# Altium PCB PCB.PcbDoc
Units mil, origin at the board's own origin, x right, y up, seen from the top; angles counter-clockwise.
Board outline 2065 x 2740 mil, 2 copper layers (Top Layer, Bottom Layer); 53 components, 32 nets, 178 pads, 6 vias.
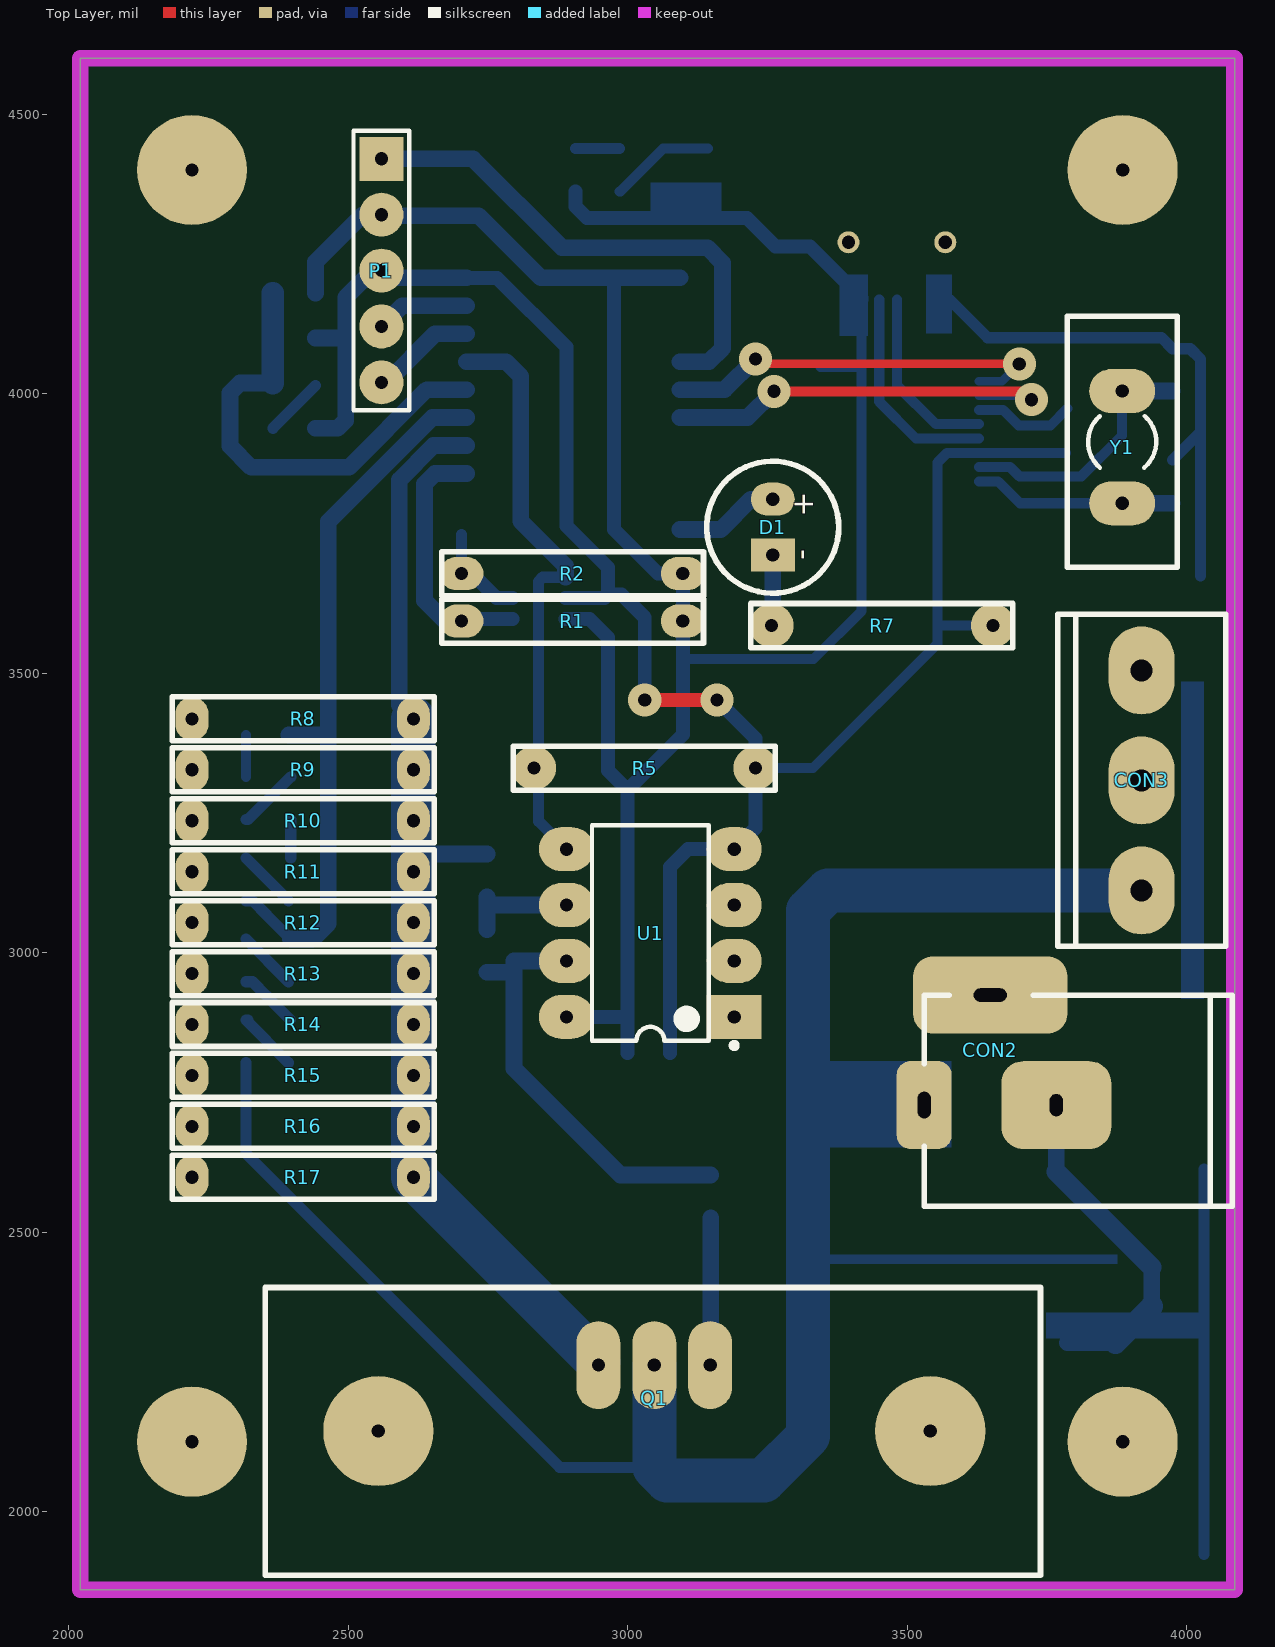
[diagram p0: Top Layer view]
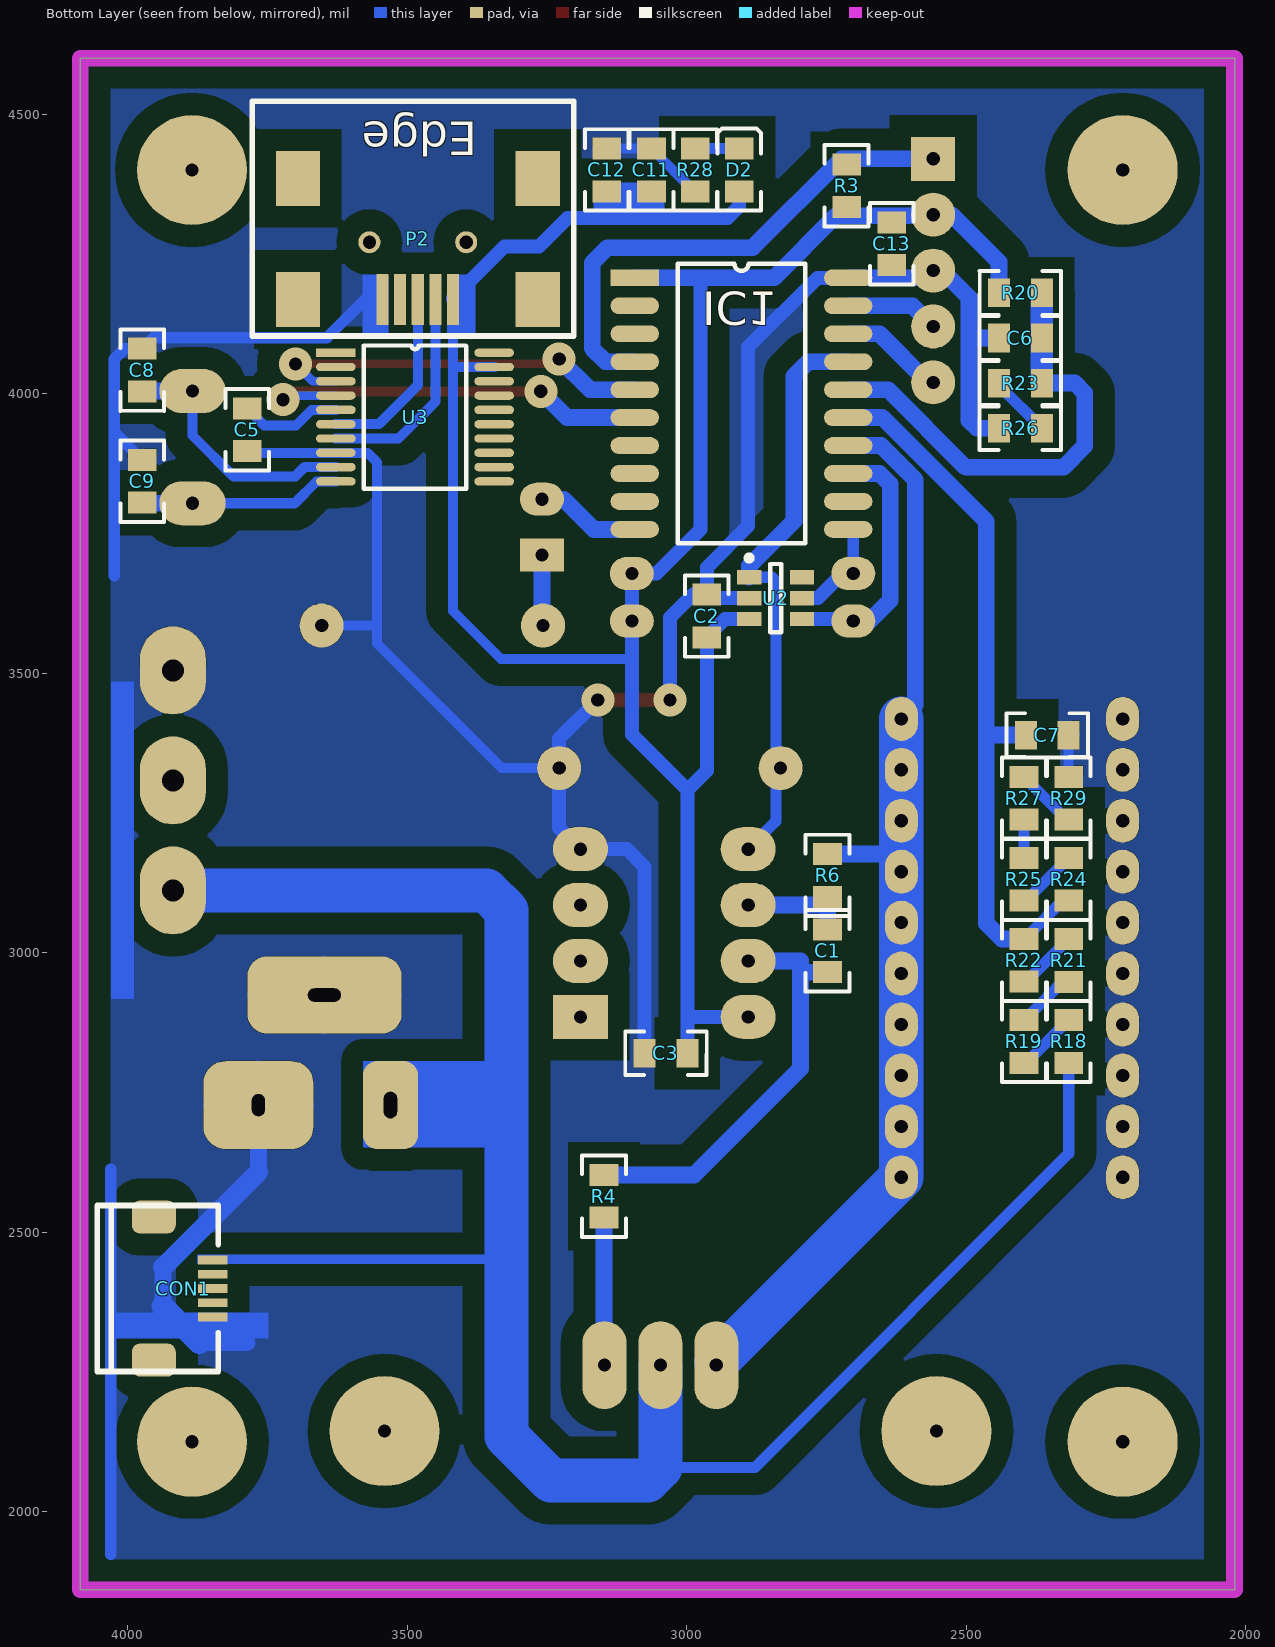
[diagram p1: Bottom Layer view, seen from below]
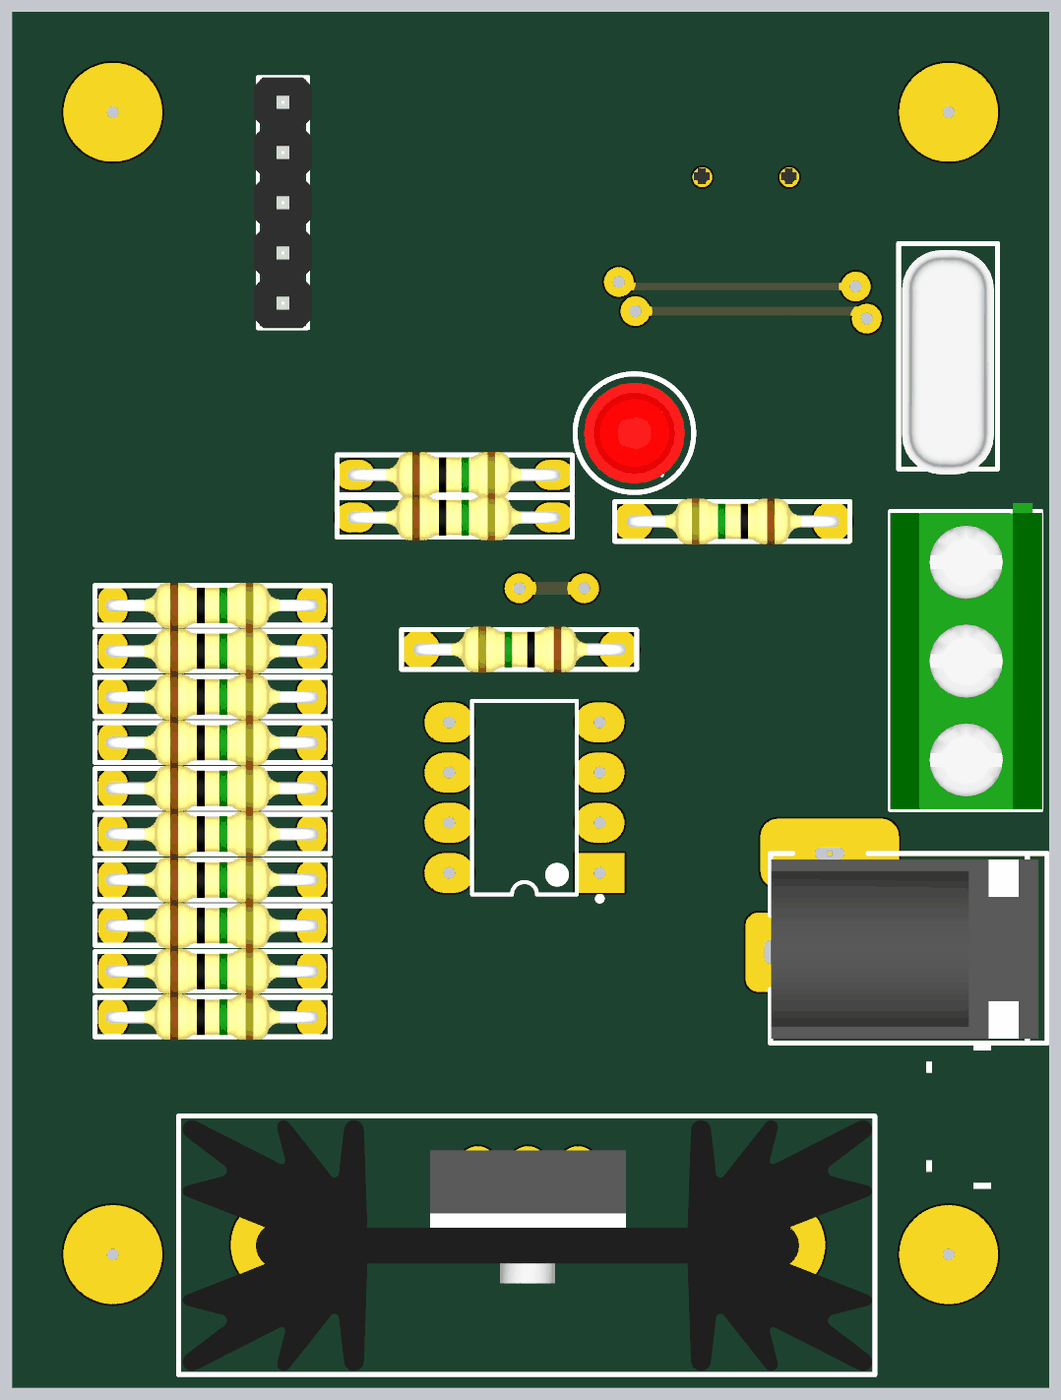
[diagram p2: 3D render of the assembled board from above, using the file's embedded part models]
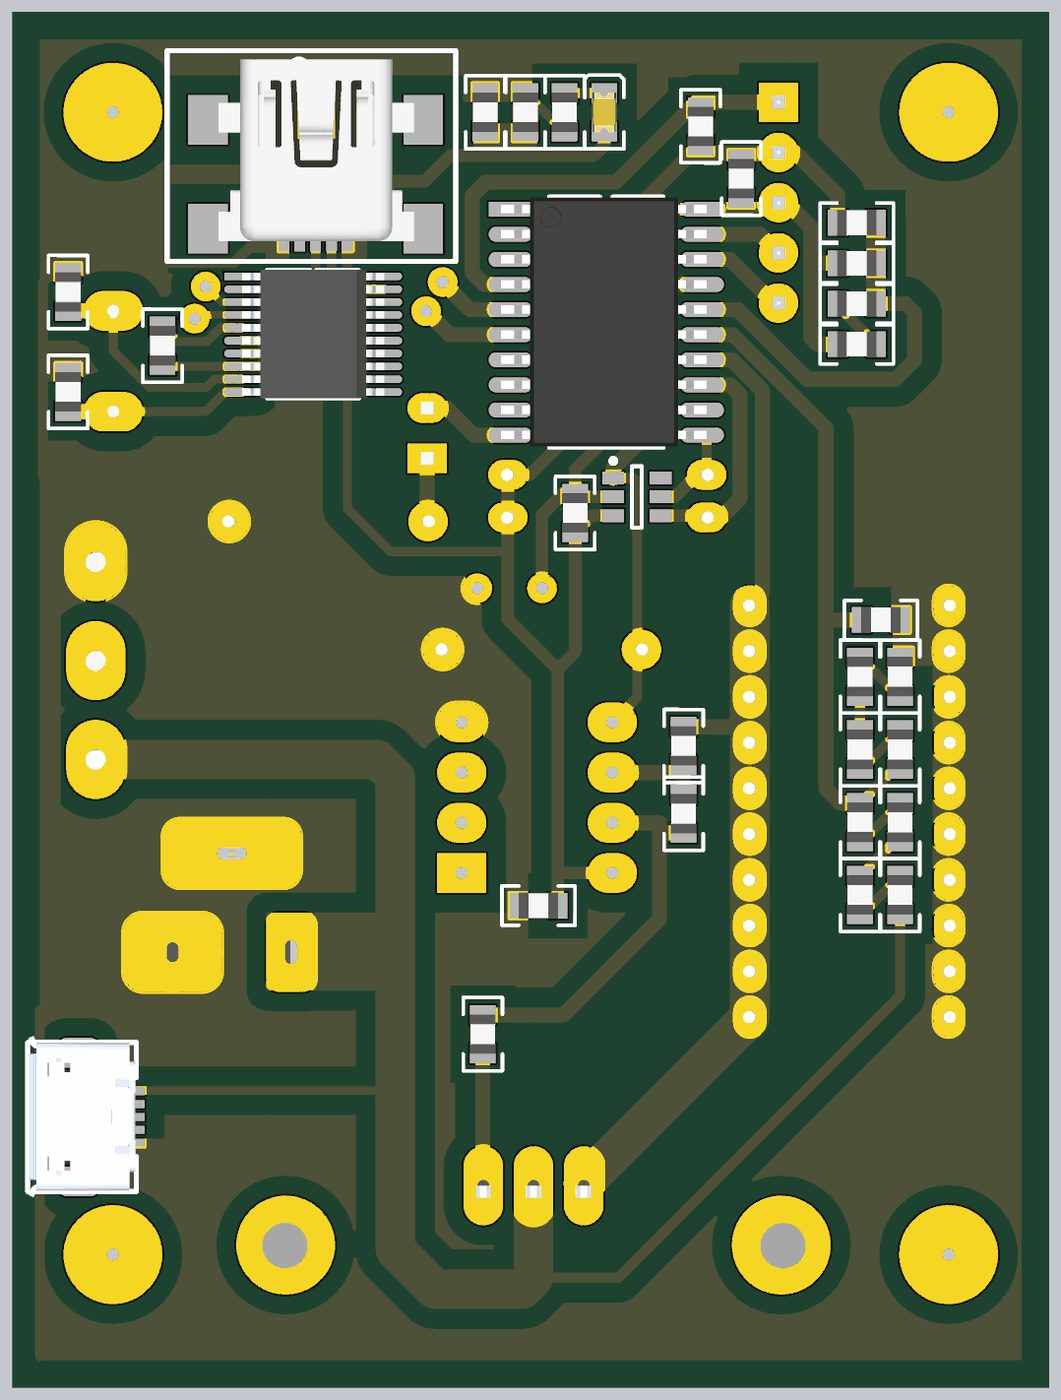
[diagram p3: 3D render of the assembled board from below, using the file's embedded part models]

## Layer stack, top to bottom
Top Solder: solder mask 0.4, Solder Resist, Dk 3.5
Top Layer: signal copper 1.4
Dielectric 1: dielectric 12.6, FR-4, Dk 4.8
Bottom Layer: signal copper 1.4
Bottom Solder: solder mask 0.4, Solder Resist, Dk 3.5

## Board outline
2020,1860 2020,4600 4085,4600 4085,1860

## Design rules (kind name [scope] priority, off if disabled: settings)
AssemblyTestPointUsage [All] p1 off:
AssemblyTestpoint [All] p1 off: testpointundercomponent=TRUE minsize=40 maxsize=100 preferedsize=60 minholesize=0 maxholesize=40 preferedholesize=32 testpointgrid=1 usegrid=TRUE gridtolerance=0.01 allowsidetop=TRUE allowsidebottom=TRUE
Clearance "Poly Clearance" [IsRegion] p1: gap=39.37
Clearance [All] p2: gap=7
ComponentClearance [All] p1 off: gap=10 collisioncheckmode=3 verticalgap=10 showdistances=FALSE
FabricationTestPointUsage [All] p1 off: valid=0 allowmultiple=FALSE
FabricationTestpoint [All] p1 off: side=3 testpointundercomponent=TRUE minsize=40 maxsize=100 preferedsize=60 minholesize=0 maxholesize=40 preferedholesize=32 testpointgrid=1 allowsidetop=TRUE allowsidebottom=TRUE usegrid=TRUE gridtolerance=0.01
FanoutControl Fanout_BGA [IsBGA] p1 off: bgadir=Out bgaviamode=Centered fanoutstyle=Auto fanoutdirection=Alternating viagrid=1 // Fanout_BGA (Default Rule)
FanoutControl Fanout_LCC [IsLCC] p2 off: bgadir=Out bgaviamode=Centered fanoutstyle=Auto fanoutdirection=Alternating viagrid=1 // Fanout_LCC (Default Rule)
FanoutControl Fanout_SOIC [IsSOIC] p3 off: bgadir=Out bgaviamode=Centered fanoutstyle=Auto fanoutdirection=Alternating viagrid=1 // Fanout_SOIC (Default Rule)
FanoutControl Fanout_Small [(CompPinCount < 5)] p4 off: bgadir=Out bgaviamode=Centered fanoutstyle=Auto fanoutdirection=OutThenIn viagrid=1 // Fanout_Small (Default Rule)
FanoutControl Fanout_Default [All] p5 off: bgadir=Out bgaviamode=Centered fanoutstyle=Auto fanoutdirection=Alternating viagrid=1 // Fanout_Default (Default Rule)
HoleSize [All] p1: absolutevalues=TRUE maxlimit=393.7 minlimit=23.62 maxpercent=80.000 minpercent=20.000
MinimumSolderMaskSliver [All] p1 off: minsoldermaskwidth=10
NetAntennae [All] p1 off: netantennaetolerance=0
PasteMaskExpansion [All] p1 off: expansion=0
PlaneClearance [All] p1 off: clearance=20
PlaneConnect [All] p1: planeconnectstyle=Direct reliefexpansion=20 reliefentries=4 reliefconductorwidth=10 reliefairgap=10
PolygonConnect [All] p1 off: connectstyle=Direct reliefconductorwidth=10 reliefentries=4 polygonreliefangle="90 Angle" airgapwidth=10
RoutingVias [All] p1: holewidth=35.43 width=59.06 viastyle="Through Hole" minholewidth=23.62 minwidth=35.43 maxholewidth=393.7 maxwidth=393.7
SilkToSilkClearance [All] p1 off: silktosilkclearance=10
SilkToSolderMaskClearance [IsPad] p1 off: minsilkscreentomaskgap=10 clearancetoexposedcopper=TRUE
SolderMaskExpansion [All] p1 off: expansion=4
Width [All] p1: maxlimit=590.55 minlimit=10 preferedwidth=20
12 further rules are at their usual default settings.

## Classes and differential pairs
net class USB: D+ D-
net class POWER: +5 PSU_+
net class UART: RXD TXD

## Components (designator, comment, footprint, x,y, rotation, side; value= is the part's Value field where it differs from the comment)
C1 "Cap" 0805 2748,3003 r270 bottom
C2 "Cap" 0805 2964,3602 r270 bottom
C3 "Cap" 0805 3037,2820 r180 bottom
C5 "Cap" 0805 3786,3935 r270 bottom
C6 "Cap" 0805 2403,4099.33 r180 bottom
C7 "Cap" 0805 2355,3389 r0 bottom
C8 "Cap" 0805 3974,4042 r270 bottom
C9 "Cap" 0805 3974,3843 r270 bottom
C11 "Cap" 0805 3063,4400 r270 bottom
C12 "Cap" 0805 3143,4400 r270 bottom
C13 "Cap" 0805 2633,4268 r90 bottom
CON1 "USB Micro" "USB Micro SMD" 3848,2399 r90 bottom
CON2 "Jack Normal 5.5mm" "Jack Normal" 3963,2924 r270 top
CON3 "3pin Terminal" "Terminal 3" 3919,3308 r90 top
D1 "LED" "LED 5mm [2.54 pin]" 3259,3761 r270 top
D2 "LED" "0805 -  LED" 2906,4400 r90 bottom
IC1 "PIC16F1829" SOP20 2902,3982 r180 bottom
P1 "Header 5" "Header 5x1" 2559,4420 r270 top
P2 "USB Connector" "USB Mini SMD TOP" 3481,4123 r0 bottom
Q1 "MOSFET-N" "TO-220 w HS2" 3047,2262 r180 top
R1 "Res" "Axial 0.4"#1 2702,3593 r0 top
R2 "Res" "Axial 0.4"#1 2702,3678 r0 top
R3 "Res" 0805 2714,4372 r270 bottom
R4 "Res" 0805 3148,2564 r270 bottom
R5 "Res" "Axial 0.4"#2 3228,3330 r180 top
R6 "Res" 0805 2748,3138 r90 bottom
R7 "Res" "Axial 0.4"#2 3653,3585 r180 top
R8 "Res" "Axial 0.4"#3 2220,3418 r0 top
R9 "Res" "Axial 0.4"#3 2220,3326.89 r0 top
R10 "Res" "Axial 0.4"#3 2220,3235.78 r0 top
R11 "Res" "Axial 0.4"#3 2220,3144.67 r0 top
R12 "Res" "Axial 0.4"#3 2220,3053.56 r0 top
R13 "Res" "Axial 0.4"#3 2220,2962.44 r0 top
R14 "Res" "Axial 0.4"#3 2220,2871.33 r0 top
R15 "Res" "Axial 0.4"#3 2220,2780.22 r0 top
R16 "Res" "Axial 0.4"#3 2220,2689.11 r0 top
R17 "Res" "Axial 0.4"#3 2220,2598 r0 top
R18 "Res" 0805 2316.59,2840.95 r270 bottom
R19 "Res" 0805 2396.59,2841 r90 bottom
R20 "Res" 0805 2403,4180 r0 bottom
R21 "Res" 0805 2316.59,2985.95 r270 bottom
R22 "Res" 0805 2396.59,2986 r90 bottom
R23 "Res" 0805 2403,4018.67 r180 bottom
R24 "Res" 0805 2316.59,3131 r270 bottom
R25 "Res" 0805 2396.59,3131 r90 bottom
R26 "Res" 0805 2403,3938 r180 bottom
R27 "Res" 0805 2396.59,3276 r270 bottom
R28 "Res" 0805 2985,4400 r90 bottom
R29 "Res" 0805 2316.59,3276.05 r90 bottom
U1 "MCP6022" PDIP300-P8 3040,3035 r180 top
U2 "MCP4726" SOT-23-CH6_N 2841,3634 r180 bottom
U3 "CH340T" SOP20-5.30mm-0.65pitch 3486,3958 r180 bottom
Y1 "12MHz" HC-49S 3884,3914 r0 top

## Footprints (in the part's own frame and the unit in brackets; to place one, negate y for a bottom-side part, rotate by r counter-clockwise, add the part's x,y. Pads: shape width x height; smd on the part's side, far side on the other; paste and mask are expansions set on the pad)
0805 [mm]
  rect 1x1.3 smd: 1(-0.97,0) 2(0.97,0)
  silkscreen extent -1.85,-0.99 1.85,0.99, body extent -1,-0.65 1,0.66, height 0.73
"0805 -  LED" [mm]
  rect 1x1.3 smd: A(-0.97,0) K(0.97,0)
  silkscreen extent -1.85,-0.99 1.88,0.99, body extent -1.01,-0.63 1.01,0.62, height 1.1
"Axial 0.4"#1 [mm] "Razmak 4x 2.54"
  oval 2x1.5 hole 0.6: 1(0,0) 2(10.06,0)
  silkscreen extent -0.9,-1 11,1, body extent -0.36,-1.16 10.4,1.15, height 2.63
"Axial 0.4"#2 [mm] "Razmak 4x 2.54"
  round 2 hole 0.6: 1(0,0) 2(10.06,0)
  silkscreen extent -0.9,-1 11,1, body extent -0.36,-1.16 10.4,1.15, height 2.63
"Axial 0.4"#3 [mm] "Razmak 4x 2.54"
  oval 1.5x2 hole 0.6: 1(0,0) 2(10.06,0)
  silkscreen extent -0.9,-1 11,1, body extent -0.36,-1.16 10.4,1.15, height 2.63
HC-49S [mm] "Crystal, Thru-Hole; 2 Leads; Body 3.1 x 8.2 mm (Dia.xH)"
  oval 3x2 hole 0.6: 1(0,2.3) 2(0,-2.8)
  silkscreen extent -2.5,-5.7 2.5,5.7, body extent -2.33,-5.98 2.32,5.38, height 3.5
"Header 5x1" [mm] "Connector; Header; 5 Position"
  rect 2x2 hole 0.6: 1(0,0)
  round 2 hole 0.6: 2(2.54,0) 3(5.08,0) 4(7.62,0) 5(10.16,0)
  silkscreen extent -1.27,-1.27 11.43,1.27, body extent -1.27,-1.46 11.43,1.46, height 8.51
"Jack Normal" [mm]
  rrect50% 4x5 hole 0.6 slot 1 at 0 deg: InsidePin(5,-5)
  rrect50% 4x2.5 hole 0.6 slot 1.2 at 0 deg: RearPin(5,-11)
  rrect50% 3.5x7 hole 0.6 slot 1.5 at 90 deg: SidePin(0,-8)
  silkscreen extent 0,-11 9.6,3, body extent 0.31,-10.97 9.38,2.57, height 10.97
"LED 5mm [2.54 pin]" [mm]
  oval 1.5x2 hole 0.6: A(-1.27,0)
  rect 1.5x2 hole 0.6: K(1.27,0)
  silkscreen extent -3,-3 3,3, body extent -2.54,-2.55 2.54,2.55, height 9.1
PDIP300-P8 [mm] "DIP, 8-Leads, Row Spacing 7.62mm, Pitch 2.54mm, Body 9.5x6.6mm"
  rect 2.5x2 hole 0.6: 1(-3.81,3.81)
  oval 2.5x2 hole 0.6: 2(-3.81,1.27) 3(-3.81,-1.27) 4(-3.81,-3.81) 5(3.81,-3.81) 6(3.81,-1.27) 7(3.81,1.27) 8(3.81,3.81)
  silkscreen extent -3.94,-4.9 2.65,5.23, body extent -3.55,-4.9 3.55,4.9, height 5.34
SOP20 [mm]
  rect 2.2x0.762 smd: 1(-4.85,5.715)
  oval 2.2x0.762 smd: 2(-4.85,4.445) 3(-4.85,3.175) 4(-4.85,1.905) 5(-4.85,0.635) 6(-4.85,-0.635) 7(-4.85,-1.905) 8(-4.85,-3.175) 9(-4.85,-4.445) 10(-4.85,-5.715) 11(4.85,-5.715) 12(4.85,-4.445) 13(4.85,-3.175) 14(4.85,-1.905) 15(4.85,-0.635) 16(4.85,0.635) 17(4.85,1.905) 18(4.85,3.175) 19(4.85,4.445) 20(4.85,5.715)
  silkscreen extent -2.89,-6.35 2.89,6.35, body extent -5.32,-6.3 5.08,6.3, height 2.6
SOP20-5.30mm-0.65pitch [mm]
  rect 1.8x0.381 smd: 1(-3.6,2.925)
  oval 1.8x0.381 smd: 2(-3.6,2.275) 3(-3.6,1.625) 4(-3.6,0.975) 5(-3.6,0.325) 6(-3.6,-0.325) 7(-3.6,-0.975) 8(-3.6,-1.625) 9(-3.6,-2.275) 10(-3.6,-2.925) 11(3.6,-2.925) 12(3.6,-2.275) 13(3.6,-1.625) 14(3.6,-0.975) 15(3.6,-0.325) 16(3.6,0.325) 17(3.6,0.975) 18(3.6,1.625) 19(3.6,2.275) 20(3.6,2.925)
  silkscreen extent -2.32,-3.25 2.32,3.25, body extent -3.95,-3.25 3.95,3.25, height 1.78
SOT-23-CH6_N [mm] "SOT23, 6-Leads, Body 2.9x1.6mm, Pitch 0.95mm, Lead Span 2.7mm, IPC Medium Density"
  rect 1.1x0.65 smd: 1(-1.2,0.95) 2(-1.2,0) 3(-1.2,-0.95) 4(1.2,-0.95) 5(1.2,0) 6(1.2,0.95)
  silkscreen extent -1.33,-1.55 0.25,1.95, body extent -0.9,-1.55 0.9,1.55, height 1.45
"Terminal 3" [mm]
  oval 4x3 hole 1: 1(-5,0) 2(0,0) 3(5,0)
  silkscreen extent -7.54,-3.81 7.54,3.81, body extent -7.52,-3.88 7.97,3.82, height 10.05
"TO-220 w HS2" [mm] "TO-220 with HeatSink2"
  oval 2x4 hole 0.6: 1(-2.54,0) 2(0,0) 3(2.54,0)
  round 5 hole 0.6: ""(-12.54,3) ""(12.54,3)
  silkscreen extent -17.55,-3.52 17.67,9.55, body extent -17.42,-3.32 17.47,9.37, height 25.4
"USB Micro SMD" [mm]
  rect 0.4x1.35 smd: D+(0,0) D-(0.65,0) GND(-1.3,0) ID(-0.65,0) VCC(1.3,0)
  rrect50% 1.5x2 smd: SH1(-3.25,2.675) SH2(3.25,2.675)
  silkscreen extent -3.77,-0.25 3.77,5.25, body extent -4.07,-0.2 4.13,5.23, height 2.68
"USB Mini SMD TOP" [mm] "5pin USB MINI SMD"
  rect 0.55x2.3 smd: D+(0,-1.15) D-(-0.8,-1.15) GND(1.6,-1.15) VCC(-1.6,-1.15) ""(0.8,-1.15)
  rect 2x2.5 smd: SH1(-5.45,-6.65) SH1(-5.45,-1.15) SH2(5.45,-6.65) SH2(5.45,-1.15)
  round 1 hole 0.6: ""(-2.2,-3.75) ""(2.2,-3.75)
  silkscreen extent -7.09,-10.15 7.52,0.51, body extent -4.98,-9.71 4.92,-0.51, height 4.14

## Part data
C1 C2 C3 C5 C6 C7 C8 C9 C11 C12 C13: "Capacitor"
CON1: library part "USB Micro TH", "Header, 4-Pin"
CON2: "DC Jack - Center and Side pin Shorted!"
CON3: library part "Terminal 3", "Header, 3-Pin"
D1 D2: "Typical RED GaAs LED"
P1: "Header, 5-Pin"
P2: "Header, 4-Pin"
Q1: "N-Channel MOSFET"
R1 R2 R3 R4 R5 R6 R7 R8 R9 R10 R11 R12 R13 R14 R15 R16 R17 R18 R19 R20 R21 R22 R23 R24 R25 R26 R27 R28 R29: "Resistor"
U1: library part MCP6022-I/P, "Rail-to-Rail Input/Output, 10 MHz Operational Amplifier, 8-Pin PDIP, Industrial Temperature"
U2: library part MCP4725A2T-E/CH, "12-Bit Digital-to-Analog Converter with EEPROM Memory in SOT-23-6, 6-Pin SOT-23, Extended Temperature, Tape and Reel"
U3: "CH340T USB-to-UART"
Y1: library part XTAL, "Crystal Oscillator"

## Free pads (board coordinates)
  round 196.85 hole 23.62: ""(2220,2125) ""(2220,4400) ""(3885,2125) ""(3885,4400)

## Via types
v1: diameter 59.06, hole 23.62, Top Layer to Bottom Layer, 6 vias

## Nets (pads, with @x,y where several pads share a name; then routed paths per layer and width w, separated by ;. In a path a pad name is that pad's centre, name@x,y a point inside that pad or via, vN(x,y) a via of type N, cw(c..) or ccw(c..) an arc to the next point about the centre after c; other vN are vias at no path point)
+5: C2.2 C3.2 C11.2 C12.2 C13.2 D2.A IC1.1 P1.2 P2.VCC R1.2 R2.2 R3.2 R20.2 U1.8 U2.3 U3.19 | length 4441.6
  Bottom Layer w18: R1.2 3098.06,3525 3332,3525 3418.01,3611.01 P2.VCC ; U3.19 3417.57,4047.57 3418.01,4048.01
  Bottom Layer w25: U2.3 2931.21,3596.6 C2.2 2964,3325.62 2998.81,3290.81 ; U1.8 2996.81,2885 ; D2.A 2906,4335 2927,4314 3213,4314 3264,4263 3326,4263 3418.01,4170.99 P2.VCC ; 2975,4207 2975,3757 3054,3678 R2.2 R1.2 3098.06,3390.06 2998.81,3290.81 ; C3.2 2998.81,3290.81
  Bottom Layer w30: R20.2 2441.19,4235.19 2526,4320 P1.2 2560.81,4318.19 2732.81,4318.19 2844,4207 2975,4207 IC1.1
AL: D1.A IC1.10 | length 188.4
  Bottom Layer w18: D1.A@3220,3811 D1.A
  Bottom Layer w30: IC1.10 3166,3757 D1.A@3220,3811
CLK: IC1.18 P1.5 | length 188.1
  Bottom Layer w30: P1.5 2568,4020 2655,4107 IC1.18
CURRENT_SENS: IC1.14 Q1.3 R6.2 R8.2 R9.2 R10.2 R11.2 R12.2 R13.2 R14.2 R15.2 R16.2 R17.2 | length 1993.7
  Bottom Layer w30: R8.2 2591,3443.06 2591,3845.67 2652.33,3907 IC1.14 ; R11.2@2625.87,3176.19 R6.2
  Bottom Layer w80: R8.2 R9.2 R10.2 R11.2 R12.2 R13.2 R14.2 R15.2 R16.2 R17.2 Q1.3@2947,2267.06
D+: P2.D+ U3.6 | length 328.9
  Bottom Layer w18: P2.D+ 3481,4015 3550.8,3945.2 U3.6
D-: P2.D- U3.7 | length 388.3
  Bottom Layer w18: P2.D- 3449.5,3985.5 3515.39,3919.61 U3.7
DAT: IC1.19 P1.4 | length 167.4
  Bottom Layer w30: P1.4 2596,4157 IC1.19
DOUT: IC1.17 R5.2 U1.5 U2.1 | length 1051.6
  Bottom Layer w20: U2.1 2847.4,3671.4 2840,3664 2840,3235 U1.5
  Bottom Layer w30: IC1.17 2782,4057 2808,4031 2808,3772 2888.24,3691.76 U2.1
G: Q1.1 R4.2 | length 264.2
  Bottom Layer w30: Q1.1 3148,2263 R4.2
GND: C2.1 C3.1 C5.2 C6.1 C7.1 C8.1 C9.1 C11.1 C12.1 C13.1 CON1.GND CON2.InsidePin CON2.SidePin CON3.3 IC1.20 P1.3 P2.GND R5.1 R7.1 R8.1 R9.1 R10.1 R11.1 R12.1 R13.1 R14.1 R15.1 R16.1 R17.1 R26.1 R28.1 R29.2 U1.4 U2.2 U3.8 | length 6109.3
  Top Layer w25: v1(3030,3452) v1(3159,3452)
  Bottom Layer w18: R29.2 C7.1@2316.59,3388.78 ; R28.1 2986.62,4361.81 C11.1 C12.1 ; R5.1 3331,3330 3554,3553 3554,3877 3571.02,3894.02 U3.8 C5.2@3783.21,3894.02 ; P2.GND 3574.98,4168.28 ; 3556,3585 R7.1
  Bottom Layer w20: 3574.98,4168.28 3643.26,4100 3954.19,4100 C8.1 4005.81,4080.19 4024,4062 4024,3931.19 ; C9.1 4024,3931.19 ; 4024,3674 4024,3931.19 ; 4030.16,1923.16 4030.16,2612.64
  Bottom Layer w25: IC1.20 2766,4207 2890,4083 2890,3763 2964,3689 C2.1 ; U2.2 2957.81,3634 C2.1 ; v1(3030,3452) 3030,3599 2988.81,3640.19 C2.1 ; C3.1 3075.19,3153.19 3107,3185 U1.4 3228,3223 R5.1 3228,3383 v1(3159,3452)
  Bottom Layer w30: R26.1 2481,3938 2495,3952 2495,4099.33 ; C6.1 2495,4099.33 ; IC1.20 2572,4207 P1.3 2543,4220 2495,4172 2495,4099.33 ; 3766.15,2607.85 CON2.InsidePin ; 3786,2302 3872,2302 ; 3937,2367 3937,2437
  Bottom Layer w35: 3766.15,2607.85 3937,2437
  Bottom Layer w40: 3872,2302 3937,2367
MCLR: IC1.4 P1.1 R3.1 | length 926
  Bottom Layer w30: P1.1 2723,4420 2882,4261 3142,4261 3169,4234 3169,4081 3145,4057 IC1.4
MCU_VCC: C6.2 IC1.16 R20.1 R23.2 | length 836.8
  Bottom Layer w30: R23.2 2305.67,4018.67 2288,4001 2288,3906 2326,3868 2500.86,3868 2639.86,4007 IC1.16
  Bottom Layer w40: R23.2 C6.2 R20.1
NetC5_1: C5.1 U3.5 | length 182.3
  Bottom Layer w18: U3.5 3671.2,3970.8 3699,3943 3755.81,3943 C5.1
NetC8_2: C8.2 U3.9 Y1.1 | length 462.6
  Bottom Layer w18: U3.9 3683.57,3868.43 ; 3684,3868 3700,3852 3811,3852 3884,3925 Y1.1 ; C8.2@3973.26,4004.55 C8.2
  Bottom Layer w30: Y1.1 C8.2@3973.26,4004.55
NetC9_2: C9.2 U3.10 Y1.2 | length 362.9
  Bottom Layer w18: U3.10 3662.16,3842.84 3701.24,3803.76 Y1.2 ; C9.2@3972.95,3803.76 C9.2
  Bottom Layer w30: Y1.2 C9.2@3972.95,3803.76
NetD1_K: D1.K R7.2 | length 126.9
  Bottom Layer w18: R7.2 R7.2@3259,3587.06
  Bottom Layer w30: R7.2@3259,3587.06 D1.K
NetD2_K: D2.K R28.2 | length 79
  Bottom Layer w20: D2.K R28.2
NetR18_1: R18.1 R19.1 | length 111.6
  Bottom Layer w20: R18.1@2320.26,2879.14 R18.1 R19.1@2392.92,2802.81
NetR19_2: R19.2 R21.2 | length 108.1
  Bottom Layer w20: R21.2 2328.02,2947.76 2354,2921.78 2354,2921.09 R19.2@2395.9,2879.19
NetR21_1: R21.1 R22.1 | length 107.9
  Bottom Layer w20: R21.1 R22.1@2392.92,2947.81
NetR23_1: R23.1 R26.2 | length 108
  Bottom Layer w20: R26.2 R23.1@2441.19,4014.38
NetR24_1: R24.1 R25.1 | length 108
  Bottom Layer w20: R24.1 R25.1@2392.97,3092.81
NetR25_2: R25.2 R27.2 | length 68.6
  Bottom Layer w20: R25.2 R27.2
NetR27_1: R27.1 R29.1 | length 111.6
  Bottom Layer w20: R29.1 2320.26,3237.86 R27.1
OP-: C1.1 R6.1 U1.6 | length 199.6
  Bottom Layer w30: C1.1 R6.1 ; R6.1@2749,3085 U1.6
OPOUT: C1.2 R4.1 U1.7 | length 764.1
  Bottom Layer w30: C1.2 2795.38,2964.81 ; U1.7 2796.19,2985 2796.19,2792.81 2986.81,2602.19 R4.1
PSU_+: CON1.VCC CON2.RearPin CON3.1 Q1.2 R18.2 | length 3177.5
  Bottom Layer w20: R18.2 2316.59,2640.41 2878,2079 3047,2079
  Bottom Layer w78.74: Q1.2 3047,2079 3070,2056 3243,2056 3322,2135 3322,3075 3358.15,3111.15 3648.04,3111.15 CON3.1
PSU_VOLT: C7.2 IC1.15 R22.2 R24.2 | length 1299.7
  Bottom Layer w20: R24.2 2327.97,3092.81 2354,3066.78 2354,3066.09 R22.2@2395.9,3024.19
  Bottom Layer w30: C7.2 2462,3389 ; R22.2@2395.9,3024.19 R22.2 2436.19,3024.19 2464,3052 2464,3771 2650,3957 IC1.15
RXD: IC1.6 U3.4 | length 730.9
  Top Layer w18: v1(3261,4004) v1@3707,4004
  Bottom Layer w15: U3.4 3714.61,3996.39 v1(3722,3989)
  Bottom Layer w30: IC1.6 3214,3957 v1(3261,4004)
SCL: IC1.11 R2.1 U2.5 | length 179.9
  Bottom Layer w20: R2.1 IC1.11@2702,3747.94
  Bottom Layer w25: R2.1 2721,3678 2765,3634 U2.5
SDA: IC1.13 R1.1 U2.4 | length 465.5
  Bottom Layer w25: R1.1 2705.6,3596.6 U2.4
  Bottom Layer w30: R1.1 2673,3593 2636,3630 2636,3838 2655,3857 IC1.13
TXD: IC1.5 U3.3 | length 706
  Top Layer w15: v1@3237,4053 v1(3700,4053)
  Bottom Layer w15: U3.3 3668.98,4021.98 v1(3700,4053)
  Bottom Layer w30: IC1.5 3173,4007 v1(3228,4062)
pads on no net: CON1.D+ CON1.D- CON1.ID CON1.SH1 CON1.SH2 CON3.2 IC1.2 IC1.3 IC1.7 IC1.8 IC1.9 IC1.12 P2. P2.SH1 P2.SH2 Q1. U1.1 U1.2 U1.3 U2.6 U3.1 U3.2 U3.11 U3.12 U3.13 U3.14 U3.15 U3.16 U3.17 U3.18 U3.20

## Polygon pours and split planes (outlines as drawn)
GND on Bottom Layer "Top Layer-No Net" (solid, remove dead copper, pour order 3): 2020,1860 2020,4600 4085,4600 4085,1860

## Keep-outs
Keep-Out Layer:
  the board outline again, w30

## Other copper
Bottom Layer:
  rectangle net PSU_+: 3287,2651 3579,2806
  rectangle net PSU_+: 3346,2443 3876,2460
  rectangle net +5: 3378,4103 3429,4213
  rectangle net GND: 3533,4107 3580,4213
  rectangle net GND: 3748,2310 4030.16,2356
  rectangle net +5: 3040,4314 3167,4378
  rectangle net GND: 3989,2917 4030.16,3485.17

## Text inside footprints (layer, text, board x,y; h text height)
D1: Top Overlay "-" at 3298.37,3721.63 h39.37 r270; Top Overlay "+" at 3298.37,3823.99 h39.37 r270
P2: Bottom Overlay "Edge" at 3375,4486 h60 r180